# EAGLE board Analog Breakout - Board (EAGLE 6.5.0)
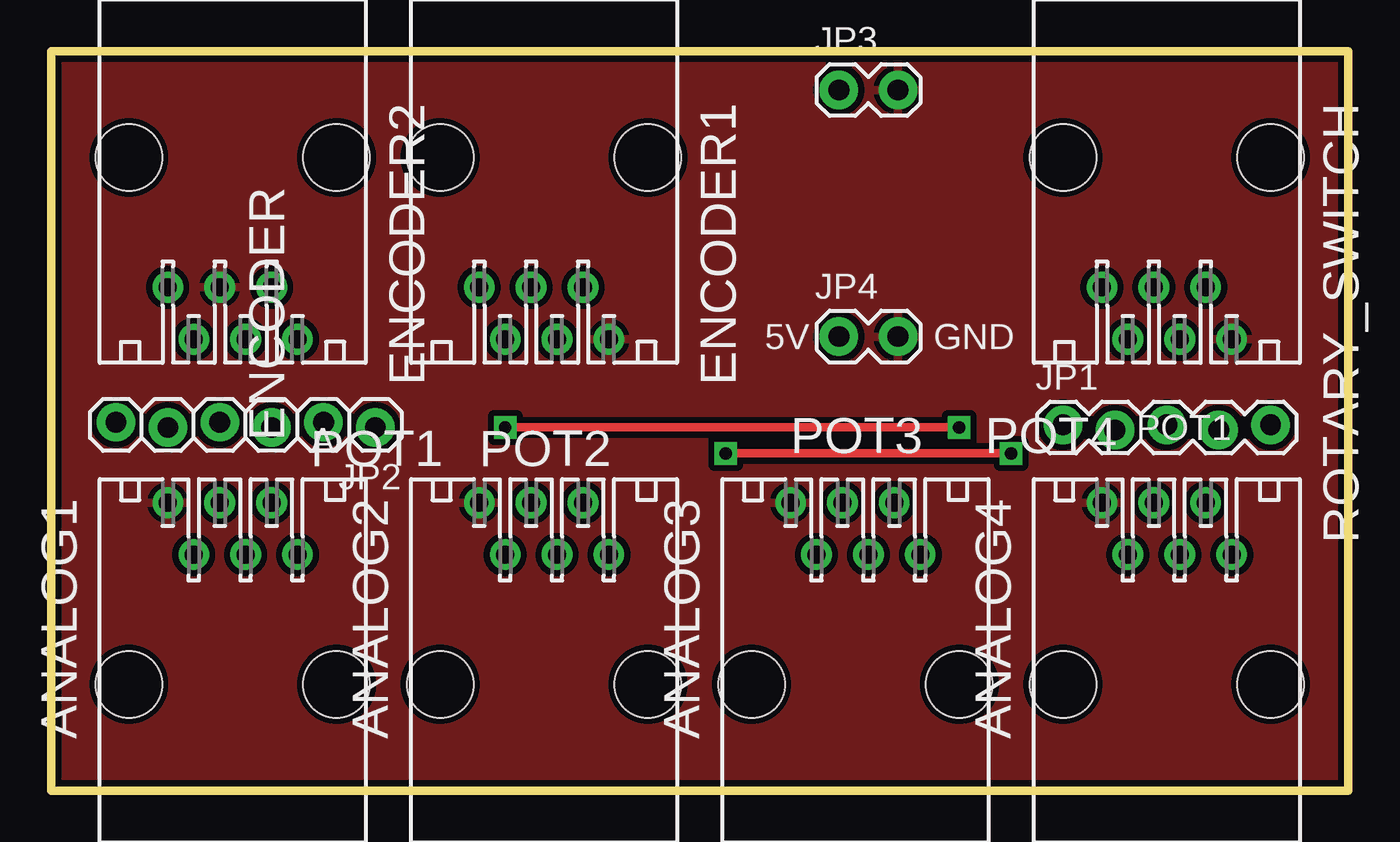
[diagram p0: board, top side]
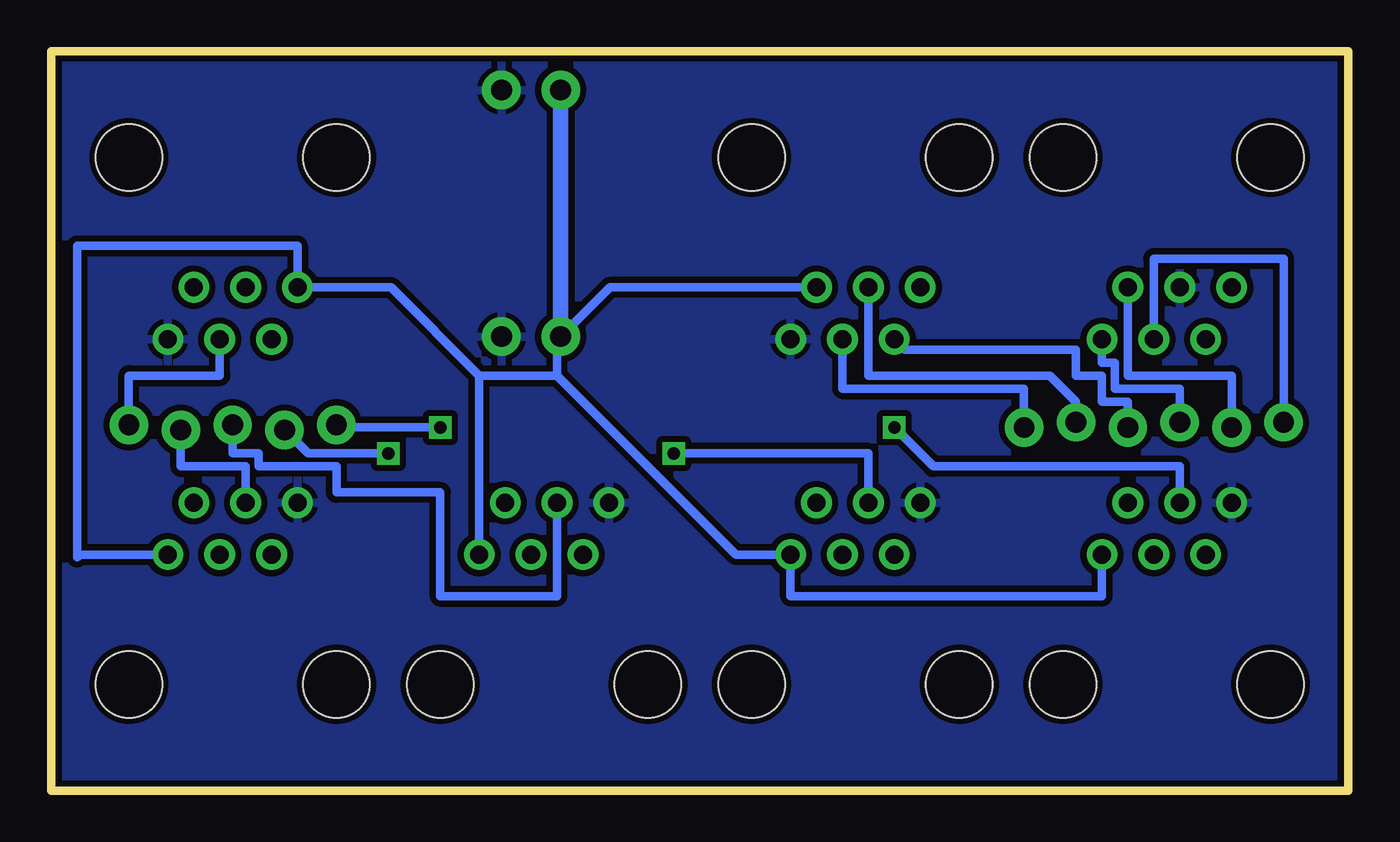
[diagram p1: board, bottom side, seen from below]

Size 63.5 x 36.2 mm. Coordinates in mm from the lower left corner, seen from the top.
Outline: 0,0 0,36.2 63.5,36.2 63.5,0 0,0
Copper layers (1*16): Top 0.035mm / dielectric 1.5mm / Bottom 0.035mm
Design rules "SparkFun": minimum track width 8mil, minimum drill 20mil, track to track 8mil, track to pad 8mil, pad to pad 8mil, via to via 8mil, smd to smd 8mil, copper to edge 8mil, drill to drill 8mil, minimum pad ring 12mil, minimum via ring 10mil, stop-mask expansion 4mil, vias tented up to drill 20mil, thermal gap 10mil

## Footprints (pad centres in the part's own frame; a part is rotated, then mirrored left to right if it is on the bottom)
555165-1 = drill 0.889: 1 -3.175,7.747; 2 -1.905,5.207; 3 -0.635,7.747; 4 0.635,5.207; 5 1.905,7.747; 6 3.175,5.207 | hole 3.251: -5.08,-1.143; 5.08,-1.143
1X05_LOCK = drill 1.016 pad 1.88: 1 0,0.127; 2 2.54,-0.127; 3 5.08,0.127; 4 7.62,-0.127; 5 10.16,0.127
1X06_LOCK = drill 1.016 pad 1.88: 1 0,0; 2 2.54,-0.254; 3 5.08,0; 4 7.62,-0.254; 5 10.16,0; 6 12.7,-0.254
1X02_LOCK = drill 1.016 pad 1.88: 1 -0.178,0; 2 2.718,0

## Placement (x,y rotation side)
ANALOG1  [555165-1]  8.89,6.35 0 top
ANALOG2  [555165-1]  24.13,6.35 0 top
ANALOG3  [555165-1]  39.37,6.35 0 top
ANALOG4  [555165-1]  54.61,6.35 0 top
ENCODER1  [555165-1]  24.13,29.84 180 top
ENCODER2  [555165-1]  8.89,29.84 180 top
JP1  [1X05_LOCK]  49.53,17.78 0 top
JP2  [1X06_LOCK]  15.88,17.78 180 top
JP3  M02LOCK  [1X02_LOCK]  38.73,34.29 0 top
JP4  M02LOCK  [1X02_LOCK]  38.73,22.23 0 top
ROTARY_SWITCH  [555165-1]  54.61,29.84 180 top

## Library data of the parts
ANALOG1-ANALOG4 ENCODER1 ENCODER2 ROTARY_SWITCH = con-amp
JP1-JP4 = SparkFun-Connectors

## Nets
ENC_CLK: ENCODER2.2 JP2.5
ENC_LE: ENCODER2.3 JP2.6
ENC_SDI: ENCODER2.1 JP2.4
ENC_SWITCH: ENCODER1.5 JP2.3
ENCA: ENCODER1.3 JP2.1
ENCB: ENCODER1.4 JP2.2
GND: ANALOG1.1 ANALOG2.1 ANALOG3.1 ANALOG4.1 ENCODER1.1 ENCODER2.4 JP3.2 JP4.2 ROTARY_SWITCH.1
POT1_SIGNAL: ANALOG1.3 JP1.1
POT2_SIGNAL: ANALOG2.3 JP1.2
POT3_SIGNAL: ANALOG3.3 JP1.3
POT4_SIGNAL: ANALOG4.3 JP1.4
ROTARY_SWITCH_SIGNAL: JP1.5 ROTARY_SWITCH.3
VCC: ANALOG1.6 ANALOG2.6 ANALOG3.6 ANALOG4.6 ENCODER1.2 JP3.1 JP4.1 ROTARY_SWITCH.6

## Tracks (layer width: path | path; a pad name or v marks a point on that pad's centre or on a via)
ENC_CLK
  Bottom 0.406: ENCODER2.2 10.79,20.32 5.71,20.32 JP2.5
ENC_LE
  Bottom 0.406: JP2.6 3.17,26.04 9.53,26.04 ENCODER2.3
ENC_SDI
  Bottom 0.406: ENCODER2.1 12.06,20.95 11.43,20.95 11.43,19.68 8.26,19.68 JP2.4
ENC_SWITCH
  Bottom 0.406: JP2.3 10.79,19.05 12.06,19.05 12.06,20.32 13.34,20.32 13.34,21.59 21.72,21.59 ENCODER1.5
ENCA
  Bottom 0.406: ENCODER1.3 24.77,19.68 15.88,19.68 JP2.1
ENCB
  Bottom 0.406: JP2.2 13.34,19.05 14.61,20.32 23.5,20.32 ENCODER1.4
GND
  pour Top (isolate 0.305): 0,0 0,36.2 63.5,36.2 63.5,0
  pour Bottom (isolate 0.305): 0,0 0,36.2 63.5,36.2 63.5,0
POT1_SIGNAL  (via drill 0.6)
  Top 0.406: v22.23,17.78 v44.45,17.78
  Bottom 0.406: ANALOG1.3 8.26,15.88 20.32,15.88 v22.23,17.78 | v44.45,17.78 49.4,17.78 JP1.1
POT2_SIGNAL  (via drill 0.6)
  Top 0.406: v33.02,16.51 v46.99,16.51
  Bottom 0.406: ANALOG2.3 23.5,16.51 v33.02,16.51 | v46.99,16.51 50.93,16.51 JP1.2
POT3_SIGNAL
  Bottom 0.406: JP1.3 54.61,16.51 53.34,16.51 53.34,15.88 49.53,15.88 49.53,14.61 44.45,14.61 44.45,9.53 38.73,9.53 ANALOG3.3
POT4_SIGNAL
  Bottom 0.406: ANALOG4.3 53.98,15.88 57.15,15.88 JP1.4
ROTARY_SWITCH_SIGNAL
  Bottom 0.406: JP1.5 59.69,20.32 55.24,20.32 ROTARY_SWITCH.3
VCC
  Bottom 0.406: ANALOG4.6 62.1,11.56 62.23,11.43 62.23,26.67 51.44,26.67 ROTARY_SWITCH.6 46.86,24.64 42.55,20.32 | ANALOG3.6 42.55,20.32 | 42.55,20.32 38.73,20.32 | 38.73,20.32 38.73,22.05 JP4.1 36.14,24.64 ENCODER1.2 | 38.73,20.32 29.97,11.56 ANALOG2.6 27.3,9.53 12.06,9.53 ANALOG1.6
  Bottom 0.762: JP3.1 JP4.1

## Text on the board
tPlace: 5V | GND | POT1 | ENCODER | A | POT3 | POT4 | POT1 | POT2